# Altium PCB PCBSystemPolive.PcbDoc
Units mm, origin at the board's own origin, x right, y up, seen from the top; angles counter-clockwise.
Board outline 112.5 x 65 mm, 2 copper layers (Top Layer, Bottom Layer), stack 1.671 mm thick; 78 components, 47 nets, 251 pads, 53 vias.
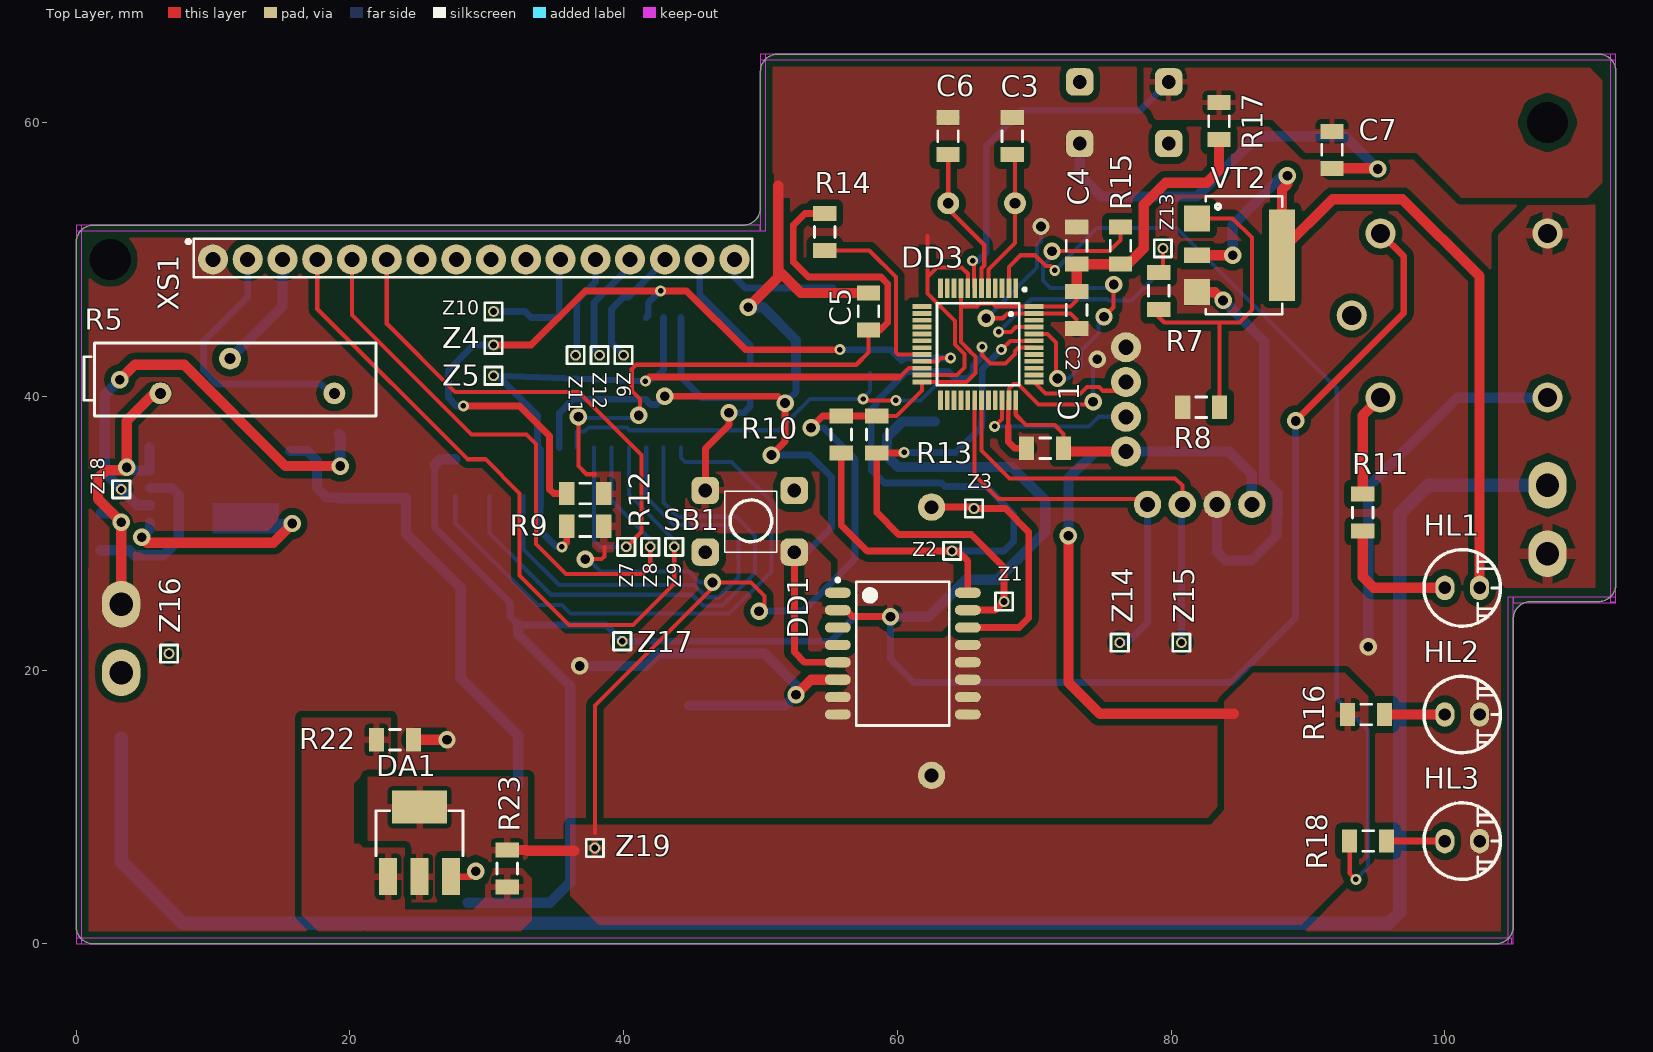
[diagram p0: Top Layer view]
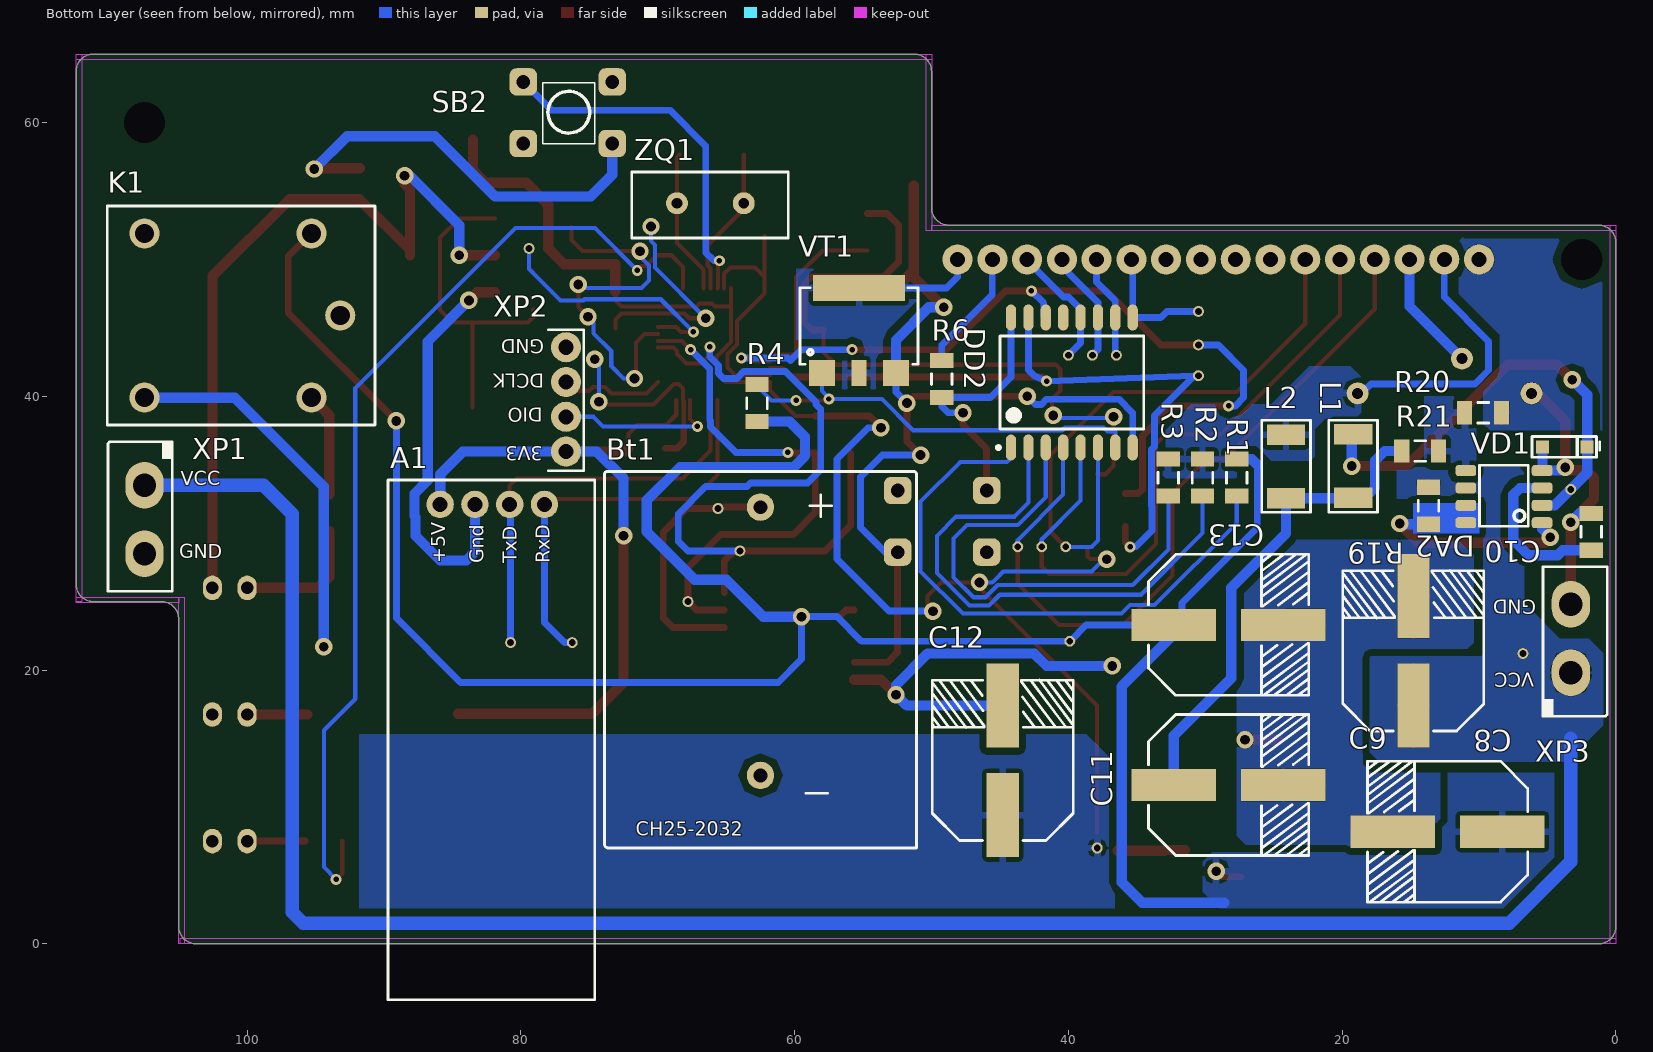
[diagram p1: Bottom Layer view, seen from below]

## Layer stack, top to bottom
Top Solder: solder mask 0.0102, Solder Resist, Dk 3.5
Top Layer: signal copper 0.0356
Dielectric 1: dielectric 1.6, FR-4, Dk 4.8
Bottom Layer: signal copper 0.0356
Bottom Solder: solder mask 0.0102, Solder Resist, Dk 3.5

## Board outline
0,2.5 0,51.23 cw(c1.27,51.23) 1.27,52.5 48.73,52.5 ccw(c48.73,53.77) 50,53.77 50,63.73 cw(c51.27,63.73) 51.27,65 111.23,65 cw(c111.23,63.73) 112.5,63.73 112.5,26.27 cw(c111.23,26.27) 111.23,25 106.27,25 ccw(c106.27,23.73) 105,23.73 105,1.27 cw(c103.73,1.27) 103.73,0 1.27,0 cw(c1.27,1.27) 0,1.27

## Design rules (kind name [scope] priority, off if disabled: settings)
Clearance [All] p1: gap=0.5 ignorepadtopadclearanceinfootprint=FALSE except(0.125: Track-Track Track-SMDPad SMDPad-SMDPad; 0.3: Arc-Arc Arc-Track Arc-SMDPad Arc-Via Track-Via Track-Fill SMDPad-THPad SMDPad-Via SMDPad-Fill THPad-THPad Via-Via Via-Fill; 0.7: Arc-Hole)
PlaneClearance [All] p1: clearance=0.75
PlaneConnect DigPAD [InPadClass('DigitAndOther')] p1: planeconnectstyle=Relief reliefexpansion=0.5 reliefentries=4 reliefconductorwidth=0.5 reliefairgap=0.3
PlaneConnect PowerPad [InPadClass('Power')] p2: planeconnectstyle=Direct reliefexpansion=0.508 reliefentries=4 reliefconductorwidth=0.254 reliefairgap=0.254
PolygonConnect PolygonConnect_5VDC [InNetClass('Power5V_3V3')] p1: connectstyle=Relief reliefconductorwidth=0.5 reliefentries=4 polygonreliefangle="90 Angle" airgapwidth=0.3
PolygonConnect PolygonConnectDIG [InNetClass('DigitalNet')] p2: connectstyle=Relief reliefconductorwidth=0.4 reliefentries=4 polygonreliefangle="90 Angle" airgapwidth=0.3
RoutingVias DIG [InNetClass('DigitalNet')] p1: holewidth=0.4 width=0.8 viastyle="Through Hole" minholewidth=0.4 minwidth=0.8 maxholewidth=0.4 maxwidth=0.8
RoutingVias 5Voltage [InNetClass('DigitalNet')] p2: holewidth=0.4 width=0.8 viastyle="Through Hole" minholewidth=0.4 minwidth=0.8 maxholewidth=0.4 maxwidth=0.8
SolderMaskExpansion [All] p1: expansion=0.102
Width DGITVDC [InNetClass('DigitalNet')] p1: maxlimit=0.5 minlimit=0.3 preferedwidth=0.35
Width 5VDC [InNetClass('Power5V_3V3')] p2: maxlimit=0.75 minlimit=0.3 preferedwidth=0.5
Width 24VDC [InNetClass('Power24V')] p3: maxlimit=1.5 minlimit=0.3 preferedwidth=0.75
28 further rules are at their usual default settings.

## Classes and differential pairs
component class LCD2004: DD2 R1 R2 R3 R4 R5 R6 VT1 XS1 Z4 Z5 Z6 Z7 Z8 Z9 Z10 Z11 Z12
component class RTC: Bt1 DD1 SB1 Z1 Z2 Z3
component class "Блок Питания": C8 C9 C10 C11 C12 C13 DA1 DA2 L1 L2 R19 R20 R21 R22 R23 VD1 XP3 Z16 Z17 Z18 Z19
component class Микроконтроллер: A1 C1 C2 C3 C4 C5 C6 C7 DD3 HL1 HL2 HL3 K1 R7 R8 R9 R10 R11 R12 R13 R14 R15 R16 R17 R18 SB2 VT2 XP1 XP2 Z13 Z14 Z15 ZQ1
net class DigitalNet: D4 D5 D6 D7 DCLK DIO E LED_OUT NetC3_1 NetC6_1 NetDD1_15 NetDD1_16 NetDD2_14 NetDD2_15 NetHL3_1 P3 pump_out RESET RS RW RxD TxD
net class Power5V_3V3: +3V3 +5V NetBt1_1 NetC11_1 NetDA1_1 NetDA2_2 NetDA2_5 NetDD2_1 NetDD2_2 NetDD2_3 NetHL1_1 NetHL1_2 NetHL2_1 NetK1_5 NetR5_2 NetR6_2 NetVT1_2
net class Power24V: +24V GND NetDA2_1 NetK1_3
pad class Power: C8-1 C8-2 C9-1 C9-2 C10-1 C10-2 C11-1 C11-2 C12-1 C12-2 C13-1 C13-2 DA1-1 DA1-2 DA1-3 DA2-1 DA2-2 DA2-3 DA2-4 DA2-5 DA2-6 DA2-7 K1-1 K1-2 K1-3 K1-4 K1-5 L1-1 L1-2 L2-1 L2-2 R1-1 R1-2 R2-1 R2-2 R3-1 R3-2 R4-1 R4-2 R5-1 R5-2 R5-3 R6-1 R6-2 R19-1 R19-2 R20-1 R20-2 R21-1 R21-2 R22-1 R22-2 R23-1 R23-2 VD1-1 VD1-2 VT1-2 VT2-2 XP1-1 XP1-2 XP2-3 XP3-1 XP3-2 Z1-1 Z2-1 Z3-1 Z4-1 Z5-1 Z6-1 Z7-1 Z8-1 Z9-1 Z10-1 Z11-1 Z12-1 Z13-1 Z14-1 Z15-1 Z16-1 Z17-1 Z18-1 Z19-1
pad class DigitAndOther: A1-1 A1-2 A1-3 A1-4 Bt1-1 Bt1-2 C1-1 C1-2 C2-1 C2-2 C3-1 C3-2 C4-1 C4-2 C5-1 C5-2 C6-1 C6-2 C7-1 C7-2 DA2-8 DD1-1 DD1-2 DD1-3 DD1-4 DD1-5 DD1-6 DD1-7 DD1-8 DD1-9 DD1-10 DD1-11 DD1-12 DD1-13 DD1-14 DD1-15 DD1-16 DD2-1 DD2-2 DD2-3 DD2-4 DD2-5 DD2-6 DD2-7 DD2-8 DD2-9 DD2-10 DD2-11 DD2-12 DD2-13 DD2-14 DD2-15 DD2-16 DD3-1 DD3-2 DD3-3 DD3-4 DD3-5 DD3-6 DD3-7 DD3-8 DD3-9 DD3-10 DD3-11 DD3-12 DD3-13 DD3-14 DD3-15 DD3-16 DD3-17 DD3-18 DD3-19 DD3-20 DD3-21 DD3-22 DD3-23 DD3-24 DD3-25 DD3-26 DD3-27 DD3-28 DD3-29 DD3-30 DD3-31 DD3-32 DD3-33 DD3-34 DD3-35 DD3-36 DD3-37 DD3-38 DD3-39 DD3-40 DD3-41 DD3-42 DD3-43 DD3-44 DD3-45 DD3-46 DD3-47 DD3-48 Free-0 HL1-1 HL1-2 HL2-1 HL2-2 HL3-1 HL3-2 R7-1 R7-2 R8-1 R8-2 R9-1 R9-2 R10-1 R10-2 R12-1 R12-2 R13-1 R13-2 R14-1 R14-2 R15-1 R15-2 R16-1 R16-2 R17-1 R17-2 R18-1 R18-2 VT1-1 VT1-2 VT1-3 VT2-1 VT2-2 VT2-3 XP2-1 XP2-2 XP2-3 XP2-4 XS1-1 XS1-2 XS1-3 XS1-4 XS1-5 XS1-6 XS1-7 XS1-8 XS1-9 XS1-10 XS1-11 XS1-12 XS1-13 XS1-14 XS1-15 XS1-16 ZQ1-1 ZQ1-2

## Components (designator, comment, footprint, x,y, rotation, side; value= is the part's Value field where it differs from the comment)
A1 "HC-06" HC-06 85.9,32.1 r180 bottom
Bt1 "CH-2032" CH25-2032 62.6,18.3 r180 bottom value=2032
C1 "100n" CAP1206 70.8,36.2 r180 top value=100nF
C2 "100n" CAP1206 73.1,46.3 r270 top value=100nF
C3 "12pF" CAP1206 68.4,59 r90 top
C4 "100n" CAP1206 73.1,51 r90 top value=100nF
C5 "100n" CAP1206 57.9,46.2 r90 top value=100nF
C6 "12pF" CAP1206 63.7,59 r90 top
C7 "100n" CAP1206 91.75,58 r270 top
C8 "100u" CAPAE120103X105MTypeG 14.8,21.4 r90 bottom value=100uF
C9 "100u" CAPAE120103X105MTypeG 12.3,8.188 r0 bottom value=100uF
C10 "470p" CAP1206 1.8,30.1 r90 bottom
C11 "100u" CAPAE120103X105MTypeG 28.3,11.6 r180 bottom value=100uF
C12 "100u" CAPAE120103X105MTypeG 44.8,13.4 r90 bottom value=100uF
C13 "100u" CAPAE120103X105MTypeG 28.3,23.3 r180 bottom value=100uF
DA1 "lm317" SOD-223 22.8,4.9 r0 top value=1.5A
DA2 "MC34063" SO-8 6.162,30.76 r0 bottom
DD1 "DS3231" SO-16 60.4,21.2 r0 top value=RTC
DD2 "PCF8574" SO-16 39.75,41 r90 bottom value=IC
DD3 "stm32f103c8t6" LQFP48 65.9,43.8 r270 top value=MPU
HL1 "GNL-3014" GNL-3014 100,26 r0 top value=RED
HL2 "GNL-3014" GNL-3014 100,16.75 r0 top value=RED
HL3 "GNL-3014" GNL-3014 100,7.5 r0 top value=RED
K1 "HJR-3FF-5VDC-S-Z" HJR-3FF 93.2,45.9 r0 bottom value=5V
L1 "CM453232-221KL" 453232 19.2,37.239 r270 bottom value=220u
L2 "CM453232-221KL" 453232 24.1,32.54 r90 bottom value=220u
R1 "10k" 1206 27.7,34.05 r270 bottom
R2 "10k" 1206 30.2,34.05 r270 bottom
R3 "10k" 1206 32.7,34.05 r270 bottom
R4 "4k7" 1206 62.75,39.5 r270 bottom value=4.7k
R5 "10kОм" 3006P 18.87,40.21 r180 top
R6 "100" 1206 49.25,41.25 r90 bottom
R7 "680" 1206 79.1,47.7 r90 top
R8 "10k" 1206 82.2,39.2 r0 top
R9 "4k7" 1206 37.2,30.5 r0 top value=4.7k
R10 "4k7" 1206 55.9,37.2 r90 top value=4.7k
R11 "680" 1206 94,31.5 r90 top
R12 "4k7" 1206 37.2,32.9 r0 top value=4.7k
R13 "4k7" 1206 58.5,37.2 r90 top value=4.7k
R14 "Resistor" 1206 54.7,52 r270 top value=100k
R15 "Resistor" 1206 76.3,51 r270 top value=100k
R16 "680" 1206 94.25,16.75 r0 top
R17 "10k" 1206 83.5,60.1 r270 top
R18 "680" 1206 94.4,7.5 r0 top
R19 "0.33" 1206 13.7,32 r270 bottom
R20 "1k2" 1206 9.7,38.8 r180 bottom
R21 "3k6" 1206 14.3,36 r0 bottom
R22 "12k" 1206 23.3,14.9 r0 top
R23 "10k" 1206 31.5,5.5 r90 top value=10K
SB1 "KLS7 TS6601-4.3" KLS2 49.3,30.9 r180 top value=100VDC
SB2 "KLS7 TS6601-4.3" KLS2 76.5,60.75 r0 bottom value=100VDC
VD1 "1N5819" SOD-123 5.366,36.3 r180 bottom value=40V
VT1 "BCP56" SOT223 55.3,41.7 r180 bottom
VT2 "BCP56" SOT223 81.9,50.3 r270 top
XP1 "KLS-2" KLS2-EDR-500-2P 107.5,33.5 r270 bottom value=1000VAC
XP2 "pls-4" Connector_STKLink 76.7,35.96 r90 bottom value=24VDC
XP3 "XY2500R-A-2P" KLS2-EDR-500-2P 3.3,19.8 r90 bottom value=500VDC
XS1 "DS1023x16" DS1023-2.54x16x1 10,50 r0 top value=500VDC
Z1 "test Point" "test Point" 67.8,25 r0 top
Z2 "test Point" "test Point" 64,28.7 r0 top
Z3 "test Point" "test Point" 65.6,31.8 r0 top
Z4 "test Point" "test Point" 30.5,43.75 r0 top
Z5 "test Point" "test Point" 30.5,41.5 r0 top
Z6 "test Point" "test Point" 40,43 r270 top
Z7 "test Point" "test Point" 40.2,29 r0 top
Z8 "test Point" "test Point" 41.95,29 r0 top
Z9 "test Point" "test Point" 43.7,29 r0 top
Z10 "test Point" "test Point" 30.5,46.2 r90 top
Z11 "test Point" "test Point" 36.5,43 r270 top
Z12 "test Point" "test Point" 38.25,43 r0 top
Z13 "test Point" "test Point" 79.4,50.8 r90 top
Z14 "test Point" "test Point" 76.25,22 r90 top
Z15 "test Point" "test Point" 80.75,22 r90 top
Z16 "test Point" "test Point" 6.8,21.2 r90 top
Z17 "test Point" "test Point" 39.9,22.1 r90 top
Z18 "test Point" "test Point" 3.3,33.2 r90 top
Z19 "test Point" "test Point" 37.9,7 r90 top
ZQ1 "8MHz" HC-49US 68.6,54.1 r180 bottom

## Footprints (in the part's own frame and the unit in brackets; to place one, negate y for a bottom-side part, rotate by r counter-clockwise, add the part's x,y. Pads: shape width x height; smd on the part's side, far side on the other; paste and mask are expansions set on the pad)
1206 [mm]
  rect 1.1x1.7 smd: 1(-1.35,0) 2(1.35,0)
  silkscreen extent -0.4,-0.75 0.4,0.75, body extent -1.55,-0.83 1.55,0.83, height 0.67
3006P [mm]
  round 1.6 hole 0.8: 1(0,0) 2(7.62,-2.54) 3(12.7,0)
  silkscreen extent -3.05,-3.68 18.29,1.65, body extent -3.05,-3.43 17.52,1.4, height 6.85
453232 [mm]
  rect 1.5x2.8 smd: 1(0,0) 2(4.639,0)
  silkscreen extent -1.02,-1.78 5.72,1.78, body extent -0.04,-1.65 4.61,1.55, height 3.05
CAP1206 [mm]
  rect 1.1x1.7 smd: 1(-1.35,0) 2(1.35,0)
  silkscreen extent -0.4,-0.75 0.4,0.75, body extent -1.6,-0.8 1.6,0.8, height 1.25
CAPAE120103X105MTypeG [mm] "Aluminum Electrolytic Capacitor, Body 11,70x10,30x10,50mm, IPC Low Density"
  rect 6.15x2.35 smd: 1(-4,0) 2(4,0)
  silkscreen extent -5.85,-5.15 5.86,5.15, body extent -5.65,-5.15 5.65,5.15, height 10.8
CH25-2032 [mm]
  round 2 hole 1: 1(0.1,13.6) 2(0.1,-6)
  silkscreen extent -11.3,-11.3 11.5,16.2, body extent -11.3,-11.3 11.5,16.2, height 9.4
Connector_STKLink [mm]
  round 2.2 hole 1.1: 1(0,0) 2(2.54,0) 3(5.08,0) 4(7.62,0)
  silkscreen extent -1.4,-1.3 8.9,1.3, body extent -1.24,-1.3 8.92,1.24, height 8.54
DS1023-2.54x16x1 [mm]
  round 2.2 hole 1.1: 1(0,0) 2(2.54,0) 3(5.08,0) 4(7.62,0) 5(10.16,0) 6(12.7,0) 7(15.24,0) 8(17.78,0) 9(20.32,0) 10(22.86,0) 11(25.4,0) 12(27.94,0) 13(30.48,0) 14(33.02,0) 15(35.56,0) 16(38.1,0)
  silkscreen extent -1.94,-1.3 39.4,1.5, body extent -1.27,-1.27 39.37,1.27, height 8.5
GNL-3014 [mm]
  oval 1.4x1.8 hole 0.9: 1(0,0) 2(2.54,0)
  silkscreen extent -1.52,-2.79 4.06,2.79, body extent -0.72,-1.5 3.26,1.99, height 6.38
HC-06 [mm]
  round 2 hole 1.1: 1(0,0) 2(2.54,0) 3(5.08,0) 4(7.62,0)
  silkscreen extent -3.81,-36.19 11.3,1.78, body extent -3.82,-36.22 11.18,1.78, height 8.46
HC-49US [mm]
  round 1.6 hole 0.8: 1(0,0) 2(4.88,0)
  silkscreen extent -3.3,-2.54 8.13,2.29, body extent -3.26,-2.41 8.09,2.24, height 3.6
HJR-3FF [mm]
  round 2.2 hole 1.4: 1(0,0) 2(2.1,-6) 3(14.3,-6) 4(14.3,6) 5(2.1,6)
  silkscreen extent -2.54,-8 17.02,8, body extent -2.26,-7.7 16.74,7.7, height 16.5
KLS2 [mm]
  rrect50% 2x2 hole 1: 1(-3.175,2.286) 2(3.325,2.286) 3(-3.175,-2.214) 4(3.325,-2.214)
  silkscreen extent -1.91,-2.16 1.9,2.29, body extent -3.12,-3 3.38,3, height 7.5
KLS2-EDR-500-2P [mm]
  oval 3.4x2.8 hole 1.7: 1(0,0) 2(5,0)
  silkscreen extent -3.18,-2.67 7.75,2.03, body extent -3,-20.69 7.49,1.64, height 18.12
LQFP48 [mm]
  rect 1.4x0.35 smd mask+0.05: 1(-4.088,2.75) 2(-4.088,2.25) 3(-4.088,1.75) 4(-4.088,1.25) 5(-4.088,0.75) 6(-4.088,0.25) 7(-4.088,-0.25) 8(-4.088,-0.75) 9(-4.088,-1.25) 10(-4.088,-1.75) 11(-4.088,-2.25) 12(-4.088,-2.75) 25(4.088,-2.75) 26(4.088,-2.25) 27(4.088,-1.75) 28(4.088,-1.25) 29(4.088,-0.75) 30(4.088,-0.25) 31(4.088,0.25) 32(4.088,0.75) 33(4.088,1.25) 34(4.088,1.75) 35(4.088,2.25) 36(4.088,2.75)
  rect 0.35x1.4 smd mask+0.05: 13(-2.75,-4.088) 14(-2.25,-4.088) 15(-1.75,-4.088) 16(-1.25,-4.088) 17(-0.75,-4.088) 18(-0.25,-4.088) 19(0.25,-4.088) 20(0.75,-4.088) 21(1.25,-4.088) 22(1.75,-4.088) 23(2.25,-4.088) 24(2.75,-4.088) 37(2.75,4.088) 38(2.25,4.088) 39(1.75,4.088) 40(1.25,4.088) 41(0.75,4.088) 42(0.25,4.088) 43(-0.25,4.088) 44(-0.75,4.088) 45(-1.25,4.088) 46(-1.75,4.088) 47(-2.25,4.088) 48(-2.75,4.088)
  silkscreen extent -4.1,-3 3,3.5, body extent -4.57,-4.57 4.57,4.57, height 1.62
SO-8 [mm]
  rrect50% 1.505x0.802 smd: 1(-0.762,0) 2(-0.762,-1.27) 3(-0.762,-2.54) 4(-0.762,-3.81) 5(4.8,-3.81) 6(4.8,-2.54) 7(4.8,-1.27) 8(4.8,0)
  silkscreen extent 0.25,-4.19 3.81,0.25, body extent -0.86,-4.39 4.92,0.51, height 1.45
SO-16 [mm] "SOIC, 16-Leads, Body 10,29x7,50mm, Pitch 1,27mm, IPC Medium Density"
  oval 1.9x0.75 smd: 1(-4.75,4.445) 2(-4.75,3.175) 3(-4.75,1.905) 4(-4.75,0.635) 5(-4.75,-0.635) 6(-4.75,-1.905) 7(-4.75,-3.175) 8(-4.75,-4.445) 9(4.75,-4.445) 10(4.75,-3.175) 11(4.75,-1.905) 12(4.75,-0.635) 13(4.75,0.635) 14(4.75,1.905) 15(4.75,3.175) 16(4.75,4.445)
  silkscreen extent -4.87,-5.25 3.4,5.49, body extent -5.15,-5.1 5.15,5.1, height 3.5
SOD-123 [mm]
  rect 0.95x0.95 smd: 1(0,0) 2(3.266,0)
  silkscreen extent -0.76,-0.76 4.19,0.76, body extent -0.2,-0.8 3.5,0.8, height 1.27
SOD-223 [mm]
  rect 1.3x2.7 smd: 1(0,0) 2(2.3,0) 3(4.6,0)
  rect 4x2.4 smd: 2(2.3,5.08)
  silkscreen extent -0.89,1.52 5.46,4.83, body extent -0.96,-1.19 5.54,5.77, height 1.7
SOT223 [mm]
  rect 1.9x1.9 smd: 1(-2.7,0) 3(2.7,0)
  rect 1.1x1.9 smd: 2(0,0)
  rect 6.7x1.9 smd: 2(0,6.2)
  silkscreen extent -4.32,0.63 4.32,6.22, body extent -3.25,0.06 3.25,7.06, height 1.7
"test Point" [mm]
  round 0.8 hole 0.5: 1(0,0)
  silkscreen extent -0.64,-0.64 0.64,0.64

## Part data
A1: Manufacturer=china, Package=none, Part Number=HC-06, Price=5, Quantity=1
Bt1: library part CR-2032, Manufacturer=Comf, Package=CH25-2032, Part Number=CH25-2032, Price=0.36, Quantity=2, ShoppingPlace=http://belchip.by/product/?selected_product=12241
C1 C2 C4 C5: library part Capasitor, Manufacturer=Samsung, Package=1206, Part Number=CL31B104KBCNNNC, Voltage=50V, Price=0.035, Quantity=20, ShoppingPlace=http://belchip.by/product/?selected_product=31093
C3 C6: library part Capasitor, Manufacturer=Samsung, Package=1206, Part Number=1206120NPO, Voltage=50V, Price=0,025, Quantity=20, ShoppingPlace=http://belchip.by/product/?selected_product=00255
C7: library part Capasitor
C8 C9 C11 C12 C13: library part "Capasitor Electrolit", Manufacturer=Samwha, Package=TypeG, Part Namber=RC1H107M08010VR, Power=50V, Price=0.23, ShoppingPlace=http://belchip.by/product/?selected_product=12709
C10: library part Capasitor, Manufacturer="FAITHFULL LINK", Package=1206, Part Number=1206471X7R, Voltage=50V, Price=0.02, Quantity=4, ShoppingPlace=http://belchip.by/product/?selected_product=00281
DA1: Manufacturer="Texas Instruments", Package=SOT-223, Part Number=LM317AEMP/NOPB, Price=2.5, Quantity=1, ShoppingPlace=http://belchip.by/product/?selected_product=11445
DA2: Manufacturer="ON Semiconductor", Package=SO-8, Part Number=MC34063ADR, Price=0,3, Quantity=4, ShoppingPlace=http://belchip.by/product/?selected_product=28823
DD1: Manufacture="Maxim Integrated Products", Part Number=DS3231SN, Packge=SO-16, Price=4, Quantity=1, ShoppingPlace=http://belchip.by/product/?selected_product=06391
DD2: Manufacturer="Texas Instruments", Package=SO-16, Part Number=PCF8574DW, Price=1.585, Quantity=3, ShoppingPlace=http://belchip.by/product/?selected_product=29967
DD3: Manufacturer=STM, Package=LQFP48, Part Number=stm32f103c8t6, Price=4, Quantity=1, ShoppingPlace=http://belchip.by/product/?selected_product=10603
HL1 HL2 HL3: library part LED, Manufacturer=G-NOR, Package=GNL, Part Number=GNL-3014SRD, Price=0.04, Quantity=6, Shopping Place=http://belchip.by/product/?selected_product=00813
K1: Manufacturer=TIANBO, Package=HJR-3FF, Part Number=HJR-3FF-5VDC-S-Z, Price=0.6, Quantity=1, ShoppingPlace=http://belchip.by/product/?selected_product=00571
L1 L2: Manufacturer=Bourns, Package=1812, Part Number=CM453232-221KL, Price=0.225, Quantity=2, ShoppingPlace=https://www.ru-chipdip.by/product/cm453232-221kl
R1 R2 R3 R8 R17 R22 R23: library part Resistor, Manufacturer=YAGEO, Package=1206, Part Number=RC1206FR-0710KL, Power=0.25W, Price=0.15
  R1 R2 R3 R8 R17: Quntity=4, ShoppingPlace=http://belchip.by/product/?selected_product=30985
  R22: Quntity=3, ShoppingPlace=http://belchip.by/product/?selected_product=01409
  R23: Quntity=3, ShoppingPlace=http://belchip.by/product/?selected_product=30985
R4 R9 R10 R12 R13: library part Resistor, Manufacturer=YAGEO, Package=1206, Part Number=RC1206JR-074K7L, Power=0.25W, Price=0,15, Quntity=4, ShoppingPlace=http://belchip.by/product/?selected_product=01399
R5: library part POT, Manufacturer=Bours, Package=3006, Part Number=3006-103-Z-LF, Power=0,125W, Price=0,445, Quantity=1, ShoppingPlace=http://belchip.by/product/?selected_product=32831
R6: library part Resistor, Manufacturer=YAGEO, Package=1206, Part Number=RC1206FR-07100RL, Power=0.25W, Price=0.15, Quntity=4, ShoppingPlace=http://belchip.by/product/?selected_product=18520
R7 R11 R16 R18: library part Resistor, Manufacturer=YAGEO, Package=1206, Part Number=RC1206JR-07680RL, Power=0.25W, Price=0,15, Quntity=4, ShoppingPlace=http://belchip.by/product/?selected_product=01380
R14 R15: Manufacturer=YAGEO, Package=1206, Part Number=RC1206JR-07100KL, Power=0.25W, Price=0,15, Quntity=4, ShoppingPlace=http://belchip.by/product/?selected_product=31131
R19: library part Resistor, Manufacturer="Royal Ohm", Package=1206, Part Number=1206R033, Power=0.25, Price=0.5, Quntity=3, ShoppingPlace=http://belchip.by/product/?selected_product=32979
R20: library part Resistor, Manufacturer="Royal Ohm", Package=1206, Part Number=1206R122, Power=0.25, Price=0.5, Quntity=3, ShoppingPlace=http://belchip.by/product/?selected_product=01386
R21: library part Resistor, Manufacturer="Royal Ohm", Package=1206, Part Number=1206R362, Power=0.25, Price=0.5, Quntity=3, ShoppingPlace=http://belchip.by/product/?selected_product=01396
SB1 SB2: library part Button, Manufacturer=KLS, Package=KLS2, Part Number="KLS7 TS6601-4.3", Price=0,04, Quantity=6, ShoppingPlace=http://belchip.by/product/?selected_product=02682
VD1: Manufacturer=GALAXY, Package=SOD-123, Power=1A, Price=0.12, Quantity=3, ShoppingPlace=http://belchip.by/product/?selected_product=08853
VT1 VT2: library part BCP56-16, Manufacturer="NXP Semiconductors", Package=SOT223, Part Number=BCP56-16, Price=BCP56, Quantity=2, ShoppingPlace=http://belchip.by/product/?selected_product=12583
XP1: library part Connector_Power, Package=KLS2, Part Number=KLS2-EDR, Price=0,13, Quantity=2, ShoppingPlace=http://belchip.by/product/?selected_product=03190
XP2: library part Connector_STKLink, Manufacturer=RUICHI, Part Number=pls-40, Price=0,12, Quantity=2, ShoppingPlace=http://belchip.by/product/?selected_product=02009
XP3: library part Connector_Power, Package=XY2500R, Part Number=XY2500R-A-2P, Price=0,10, Quantity=1, ShoppingPlace=http://belchip.by/product/?selected_product=14514
XS1: library part DS1023x2.54x16x1, Manufacturer="Ningbo connfly electronic", Package=DS1023, Part Number=DS1023-1*16S21, Price=0.12, Quantity=4, ShoppingPlace=https://www.ru-chipdip.by/product/pbs16
ZQ1: library part Rzanator, Manufacturer=GEYER, Package=HC-49US, Part Number=HC-49US, Price=0,255, Quantity=1, ShoppingPlace=http://belchip.by/product/?selected_product=33253

## Free pads (board coordinates)
  round 0 hole 3: 0(2.5,50) 0(107.5,60)

## Via types
v1: diameter 1.27, hole 0.711, Top Layer to Bottom Layer, 37 vias
v2: diameter 0.8, hole 0.4, Top Layer to Bottom Layer, 16 vias

## Nets (pads, with @x,y where several pads share a name; then routed paths per layer and width w, separated by ;. In a path a pad name is that pad's centre, name@x,y a point inside that pad or via, vN(x,y) a via of type N, cw(c..) or ccw(c..) an arc to the next point about the centre after c; other vN are vias at no path point)
+3V3: A1.1 C1.1 C2.1 C4.1 C5.1 C12.1 DA1.2 DD3.9 DD3.24 DD3.36 DD3.48 R9.2 R10.2 R12.2 R13.2 R14.1 R15.2 R16.1 R17.2 R23.2 XP2.1 Z19.1 | length 220.1
  Top Layer w0.3: v1(36.7,38.5) 36.7,34.9 37.3,34.3 37.9,34.3 ; v1(37.2,28.1) 38.4,28.1 38.6,28.3 38.6,29 ; 37.9,8.1 37.9,17.4 v1@46.7,26.2 ; v1(41.1,38.6) 41.2,38.5 41.2,39.8 40.6,40.4 40.6,42 40.9,42.3 57,42.3 57.9,43.2 C5.1 ; v1(46.5,26.4) 49.3,26.4 50.3,25.4 50.3,24.7 v1(49.9,24.3) ; R13.2 59.952,38.55 61.812,40.41 DD3.24 65.05,41.05 65.7,41.7 65.7,42.898 65.35,43.248 65.35,43.25 64.65,43.95 64.65,46.7 ; DD3.9 64.65,46.7 ; DD3.36 68.65,38.65 69.4,37.9 71.5,37.9 72.15,37.25 C1.1 ; C2.1 73.1,47 72.65,46.55 DD3.48 67.184,46.55 66.949,46.785 66.051,46.785 65.816,46.55 64.8,46.55 64.65,46.7
  Top Layer w0.5: v1(53.7,37.7) 54.55,38.55 R10.2 R13.2 ; R14.1 53.25,53.35 52.4,52.5 52.4,49.8 53.5,48.7 58.8,48.7 59.3,48.2 59.3,45.4 58.75,44.85 C5.1
  Top Layer w0.75: R23.2 32.95,6.85 33,6.8 36.4,6.8 ; C1.1 72.39,35.96 XP2.1 ; v1(72.5,29.8) 72.5,19.1 74.8,16.8 84.6,16.8 ; C2.1 C4.1 R15.2 76.85,49.65 78,50.8 78,54 79.6,55.6 82.6,55.6 83.5,56.5 R17.2
  Bottom Layer w0.3: v1(36.7,38.5) 36.8,38.4 40.9,38.4 v1(41.1,38.6) ; v1(37.2,28.1) 37.4,28.1 38.3,27.2 44.763,27.2 45.338,26.625 45.341,26.625 45.567,26.4 v1(46.5,26.4)
  Bottom Layer w0.5: v1(49.9,24.3) 53.1,24.3 56.9,28.1 56.9,35.4 54.6,37.7 v1(53.7,37.7)
  Bottom Layer w0.75: v1(72.5,29.8) 72.5,34 74.46,35.96 XP2.1 84.24,35.96 85.9,34.3 A1.1
+5V: C9.1 C13.1 DA1.3 DD1.2 DD1.4 DD2.16 K1.2 L2.2 R1.1 R2.1 R3.1 R4.2 R5.1 R6.1 SB1.4 XS1.2 Z17.1 | length 219.2
  Top Layer w0.5: DA1.3 28.8,4.9 v1(29.2,5.3) ; SB1.4 45.975,36.175 47.7,37.9 v1(47.7,38.8) ; DD1.2 56.263,24.375 56.738,23.9 v1(59.5,23.9) ; v1(89.1,38.2) 97,46.1 97,50.2 K1.2
  Bottom Layer w0.5: XS1.2 12.54,47.24 9.3,44 9.3,41.9 10.3,40.9 17.9,40.9 18.59,40.21 R5.1 ; 26.2,35 26.2,30.4 31.7,24.9 31.7,23.9 C13.1 38.7,23.3 Z17.1 55.1,22.1 56.9,23.9 v1(59.5,23.9) 59.5,20.8 61.2,19.1 84.4,19.1 89.1,23.8 v1(89.1,38.2) ; DD2.16 44.195,41.405 45.7,39.9 R6.1 49.25,39.25 48.8,38.8 v1(47.7,38.8)
  Bottom Layer w0.75: 26.2,35 26.6,35.4 R1.1 ; 28.6,3 34.6,3 36.1,4.5 36.1,18.8 32.3,22.6 C13.1 ; v1(59.5,23.9) 62.3,23.9 65,26.6 67.3,26.6 70.8,30.1 70.8,32.4 68.375,34.825 60.055,34.825 59.25,35.63 59.25,37.05 60.35,38.15 R4.2
+24V: C8.1 DA2.6 R19.1 XP1.1 XP3.1 Z16.1 | length 145.4
  Bottom Layer w1: 3.3,15 3.3,6 7.8,1.5 95.9,1.5 96.7,2.3 96.7,31.4 98.8,33.5 XP1.1
D4: DD2.9 XS1.11 Z10.1 | length 9.3
  Bottom Layer w0.5: Z10.1 32.8,46.2 33.25,45.75 DD2.9 35.305,49.905 XS1.11
D5: DD2.10 XS1.12 Z11.1 | length 7.6
  Bottom Layer w0.5: Z11.1 36.575,43.075 DD2.10 36.575,46.975 37.94,48.34 XS1.12
D6: DD2.11 XS1.13 Z12.1 | length 8.3
  Bottom Layer w0.5: Z12.1 37.845,43.405 DD2.11 37.845,46.845 40.48,49.48 XS1.13
D7: DD2.12 XS1.14 Z6.1 | length 9.4
  Bottom Layer w0.5: Z6.1 39.115,43.885 DD2.12 39.115,46.363 40.002,47.25 40.346,47.25 42.33,49.234 42.33,49.73 42.6,50 XS1.14
DCLK: DD3.37 XP2.3 | length 7.6
  Top Layer w0.3: DD3.37 70.823,40.215 73.381,40.215 73.851,40.685 74.749,40.685 75.034,40.4 76.06,40.4 XP2.3
DIO: DD3.34 XP2.2 | length 12
  Top Layer w0.3: v2(67.1,37.8) 67.65,38.35 DD3.34
  Bottom Layer w0.3: v2(67.1,37.8) 74,37.8 74.7,38.5 XP2.2
E: DD2.6 XS1.6 Z7.1 | length 43.8
  Top Layer w0.3: XS1.6 22.7,45.3 27.7,40.3 36.7,40.3 41.3,35.7 41.3,30.1 Z7.1
  Bottom Layer w0.3: DD2.6 37.845,29.455 38.3,29 Z7.1
GND: A1.2 Bt1.2 C1.2 C2.2 C3.2 C4.2 C5.2 C6.2 C7.2 C8.2 C9.2 C10.2 C11.2 C12.2 C13.2 DA2.4 DD1.5 DD1.6 DD1.7 DD1.8 DD1.9 DD1.10 DD1.11 DD1.12 DD1.13 DD2.8 DD3.8 DD3.23 DD3.35 DD3.47 HL2.2 HL3.2 K1.4 R5.3 R8.1 R20.2 R22.2 SB1.1 SB2.1 VD1.1 VT1.3 VT2.3 XP2.4 XP3.2 XS1.1 | length 268.5
  Top Layer w0.3: DD3.23 64.35,41.55 64.9,42.1 64.9,43.099 64.225,43.774 64.225,44.075 64.2,44.1 64.2,45.5 62.2,47.5 62.2,48.7 ; 62.2,51.7 62.2,48.7 ; DD3.8 65.15,48.95 64.7,49.4 62.9,49.4 62.2,48.7 ; v1(66.5,45.7) 67.7,45.7 68.05,46.05 DD3.47 72.65,46.05 73.1,45.6 C2.2 ; 68.1,37.8 68.1,39.662 DD3.35 68.15,40.55 68.5,40.9 68.8,40.9 70.3,39.4 74.1,39.4 v1(74.3,39.6)
  Top Layer w0.5: v1(43,40) 51.3,40 v1(51.8,39.5) 51.8,36.7 v1(50.8,35.7) ; SB1.1 52.475,21.325 53.235,20.565 DD1.5 ; 68.1,37.8 68.1,36.7 68.6,36.2 C1.2
  Top Layer w0.75: XP3.2 v1(3.3,30.8) 1.6,32.5 1.6,34 2.2,34.6 3.5,34.6 v1(3.7,34.8) 3.7,38.2 5.71,40.21 R5.3 ; R22.2 v1(27.1,14.9) ; v1(49.1,46.5) 51.3,48.7 51.3,49.2 ; 51.3,55.4 51.3,49.2 ; v1(52.6,18.2) 53.695,19.295 DD1.6 ; C5.2 52.95,47.55 51.3,49.2 ; VT2.3 83.2,47.6 v1(83.8,47) ; C7.2 95.15,56.65 v1(95.1,56.6)
  Bottom Layer w0.3: v1(66.5,45.7) 70.215,49.415 70.215,51.049 70.5,51.334 v1(70.5,52.4) ; v1(74.3,39.6) 74.3,42.4 v1(74.6,42.7)
  Bottom Layer w0.5: DD2.8 35.305,38.781 36.309,39.785 41.591,39.785 41.976,39.4 42.4,39.4 v1(43,40) ; v1(50.8,35.7) 53.6,35.7 55.2,34.1 55.2,30.4 53.414,28.614 SB1.1 ; v1(51.8,39.5) 52.6,40.3 VT1.3
  Bottom Layer w0.75: C10.2 2.65,31.45 v1(3.3,30.8) ; v1(3.7,34.8) 3.93,34.57 DA2.4 5.366,34.604 VD1.1 ; v1(36.8,20.3) 41.6,20.3 42.5,21.2 50.3,21.2 52.6,18.9 v1(52.6,18.2) 51.8,17.4 C12.2 ; v1(49.1,46.5) 50.2,46.5 52.6,44.1 VT1.3 ; SB2.1 73.325,56.175 74.9,54.6 81.9,54.6 86.3,59 92.7,59 v1(95.1,56.6) ; A1.2 83.36,28.64 84,28 85.9,28 87.7,29.8 87.7,31.173 87.775,31.248 87.775,32.877 86.8,33.852 86.8,44 v1(83.8,47) ; v1(94.4,21.7) 94.4,33.4 100.9,39.9 K1.4
LED_OUT: DD3.2 R18.1 | length 72.7
  Top Layer w0.3: DD3.2 68.15,49.45 69,50.3 70.066,50.3 70.851,49.515 71.185,49.515 v2(71.5,49.2) ; R18.1 93.05,5.15 v2(93.5,4.7)
  Bottom Layer w0.3: v2(71.5,49.2) 74.6,52.3 80.4,52.3 92.1,40.6 92.1,17.9 94.4,15.6 94.4,5.6 v2(93.5,4.7)
NetBt1_1: Bt1.1 DD1.14 Z3.1 | length 18.9
  Top Layer w0.5: Bt1.1 65.5,31.9 Z3.1 67.9,31.8 69.6,30.1 69.6,23.8 68.905,23.105 DD1.14
NetC3_1: C3.1 DD3.5 ZQ1.1 | length 10.7
  Top Layer w0.3: DD3.5 66.65,49.247 68.6,51.197 ZQ1.1 68.6,57.45 C3.1
NetC6_1: C6.1 DD3.6 ZQ1.2 | length 10.9
  Top Layer w0.3: C6.1 63.72,57.63 ZQ1.2 63.72,53.68 66.35,51.05 66.35,49.548 66.15,49.348 DD3.6
NetC10_1: C10.1 DA2.3 | length 11.9
  Bottom Layer w0.75: C10.1 3.897,28.75 4.257,28.39 6.39,28.39 7.5,29.5 7.5,32.8 7,33.3 DA2.3
NetC11_1: C11.1 L1.2 L2.1 R21.2 | length 35.4
  Bottom Layer w0.75: R21.2 16.9,36 17.6,35.3 17.6,33.3 18.3,32.6 L1.2 19.26,32.54 L2.1 24.1,30 28.1,26 28.1,19.4 32.3,15.2 C11.1
NetDA1_1: DA1.1 R22.1 R23.1
NetDA2_1: DA2.1 DA2.7 DA2.8 R19.2 | length 15.2
  Top Layer w0.75: v1(4.8,29.7) 5.2,29.3 14.4,29.3 v1(15.8,30.7)
  Bottom Layer w0.75: v1(4.8,29.7) 5.4,30.3 DA2.1 ; R19.2 15.75,30.65 v1(15.8,30.7)
NetDA2_2: DA2.2 L1.1 VD1.2 Z18.1 | length 33.5
  Top Layer w0.75: v1(3.2,41.2) 4.3,42.3 7.9,42.3 15.3,34.9 v1(19.3,34.9)
  Bottom Layer w0.75: v1(3.2,41.2) 2.1,40.1 VD1.2 2.1,34.4 Z18.1 4.47,32.03 DA2.2 ; L1.1 19.3,37.139 v1(19.3,34.9)
NetDA2_5: DA2.5 R20.1 R21.1
NetDD1_15: DD1.15 DD3.43 R13.1 Z1.1 | length 38.1
  Top Layer w0.3: v2(67.6,43.4) 68.25,44.05 DD3.43
  Top Layer w0.5: v2(60.5,35.9) 60.45,35.85 R13.1 58.5,31.5 60.1,29.9 65.4,29.9 67.8,27.5 Z1.1 67.175,24.375 DD1.15
  Bottom Layer w0.5: v2(60.5,35.9) 64.3,35.9 66.15,37.75 66.15,38.194 66.2,38.244 66.2,42 v2(67.6,43.4)
NetDD1_16: DD1.16 DD3.42 R10.1 Z2.1 | length 57.4
  Top Layer w0.3: v2(66.2,43.6) 66.2,43 66.8,42.4 67.9,42.4 68.6,43.1 68.6,43.3 68.85,43.55 DD3.42
  Top Layer w0.5: R10.1 55.9,30.6 57.8,28.7 Z2.1 64.4,28.7 65.15,27.95 DD1.16
  Bottom Layer w0.5: Z2.1 67.8,28.7 68.5,29.4 68.5,31.4 66.5,33.4 63.475,33.4 63.225,33.65 59.05,33.65 58.1,34.6 58.1,39.056 58.45,39.406 58.45,39.594 60.656,41.8 63.73,41.8 64.23,41.3 65.2,41.3 65.575,41.675 65.575,42.259 66.2,42.884 v2(66.2,43.6)
NetDD2_1: DD2.1 R1.2 | length 42.9
  Bottom Layer w0.3: R1.2 27.7,30.75 33.7,24.75 35.489,24.75 36.124,24.115 47.715,24.115 50.8,27.2 50.8,32.3 47.9,35.2 44.5,35.2 44.195,35.505 DD2.1
NetDD2_2: DD2.2 R2.2 | length 39.7
  Bottom Layer w0.3: R2.2 30.2,30 34.7,25.5 45.017,25.5 45.802,24.715 47.215,24.715 49.6,27.1 49.6,29.8 48.2,31.2 43.949,31.2 42.925,32.224 DD2.2
NetDD2_3: DD2.3 R3.2 | length 36.1
  Bottom Layer w0.3: R3.2 32.7,28.8 35.3,26.2 45.165,26.2 46.05,25.315 46.949,25.315 48.4,26.766 48.4,29.6 47.4,30.6 43.7,30.6 41.655,32.645 DD2.3
NetDD2_14: DD2.14 DD3.21 R12.1 Z4.1 | length 61.7
  Top Layer w0.3: DD3.21 62.95,42.55 63.2,42.8 v2(63.9,42.8)
  Top Layer w0.5: v2(28.3,39.3) 32.4,39.3 34.6,37.1 34.6,33.2 34.9,32.9 R12.1 ; Z4.1 33.25,43.75 37.2,47.7 v2(42.7,47.7) 44.6,47.7 48.9,43.4 v2(55.8,43.4)
  Bottom Layer w0.5: v2(28.3,39.3) 27.8,39.3 27.2,39.9 27.2,41.9 29.05,43.75 Z4.1 ; DD2.14 41.8,45.895 41.8,46.8 v2(42.7,47.7) ; v2(55.8,43.4) 59.5,43.4 60.3,42.6 60.5,42.8 v2(63.9,42.8)
NetDD2_15: DD2.15 DD3.22 R9.1 Z5.1 | length 53.5
  Top Layer w0.3: 60.075,41.4 60.3,41.5 60.85,42.05 DD3.22
  Top Layer w0.5: v2(35.5,29) 35.85,29.35 R9.1 ; v2(41.6,41.1) 41.9,41.4 60.075,41.4
  Bottom Layer w0.5: Z5.1 Z5.1@30.8,41.5 ; v2(35.5,29) 35.1,29 33.9,30.2 33.9,31.945 33.925,31.97 33.925,36.105 33.705,36.325 33.705,38.595 Z5.1@30.8,41.5 ; DD2.15 42.925,41.925 42.5,41.5 v2(41.6,41.1) Z5.1@30.8,41.5
NetDD3_20: DD3.20 R14.2 | length 13.5
  Top Layer w0.3: R14.2 57.95,50.65 59.9,48.7 59.9,43.2 60.05,43.05 DD3.20
NetDD3_44: DD3.44 R15.1 | length 27.8
  Top Layer w0.3: DD3.44 70.967,44.55 71.6,43.917 71.6,41.2 v1(71.7,41.3) ; v1(71.3,50.6) 75.5,50.6 76.3,51.4 R15.1 ; v1(75.1,45.8) 75.804,46.504 v1(75.804,48.165) 75.635,48.165 v1@75.6,48.2
  Bottom Layer w0.3: v1(71.3,50.6) 71.3,50.202 70.65,49.552 70.65,48.45 71.2,47.9 75.2,47.9 v1@75.465,48.165 ; v1(71.7,41.3) 72.5,41.3 73.4,42.2 73.4,43.3 74.7,44.6 74.7,45.4 v1(75.1,45.8)
NetHL1_1: HL1.1 R11.1 | length 9.7
  Top Layer w0.75: R11.1 94,26.8 94.8,26 HL1.1
NetHL1_2: HL1.2 VT2.2 | length 57.3
  Top Layer w0.75: VT2.2@81.9,50.3 v1(84.5,50.3) ; VT2.2@88.1,50.3 VT2.2@88.1,50.7 ; v1(88.5,56.1) 88.5,55.5 88.1,55.1 VT2.2@88.1,50.7 ; HL1.2 102.54,48.76 96.9,54.4 91.8,54.4 VT2.2@88.1,50.7
  Bottom Layer w0.75: v1(84.5,50.3) 84.5,52.5 88.1,56.1 v1(88.5,56.1)
NetHL2_1: HL2.1 R16.2 | length 4.4
  Top Layer w0.75: R16.2 HL2.1
NetHL3_1: HL3.1 R18.2 | length 4.3
  Top Layer w0.5: R18.2 HL3.1
NetK1_3: K1.3 XP1.2
NetK1_5: K1.5 R11.2 | length 7.6
  Top Layer w0.75: R11.2 94,38.6 K1.5
NetR5_2: R5.2 XS1.3 | length 8.8
  Bottom Layer w0.75: R5.2 15.08,46.58 XS1.3
NetR6_2: R6.2 XS1.15 | length 8.9
  Bottom Layer w0.5: XS1.15 45.56,47.44 49.25,43.75 R6.2
NetR7_1: R7.1 R8.2 VT2.1 | length 24
  Top Layer w0.3: R7.1 79.1,45.8 79.5,45.4 83.6,45.4 ; VT2.1 84.5,53 85.9,51.6 85.9,46.3 85,45.4 83.6,45.4 ; R8.2 83.55,45.35 83.6,45.4
NetVT1_2: VT1.2 XS1.16 | length 8.8
  Bottom Layer w0.5: XS1.16 48.1,48.7 48.9,47.9 VT1.2@55.3,47.9
P3: DD2.7 R4.1 VT1.1 | length 31.2
  Top Layer w0.3: v2@57.5,39.7 v2(59.9,39.7)
  Bottom Layer w0.3: DD2.7 36.575,37.375 36.615,37.415 37.149,37.415 37.449,37.715 40.251,37.715 40.451,37.515 51.349,37.515 53.634,39.8 v2@57.4,39.8 ; v2(57.5,39.8) v2@57.4,39.8 ; VT1.1 58,40.4 v2@57.4,39.8 ; v2(59.9,39.7) 61.7,39.7 62.75,40.75 R4.1
pump_out: DD3.45 R7.2 Z13.1 | length 20.1
  Top Layer w0.3: v2(67.4,44.7) 68.3,44.7 68.65,45.05 DD3.45 ; R7.2 79.4,49.35 Z13.1
  Bottom Layer w0.3: v2(67.4,44.7) 69.785,47.085 75.349,47.085 75.434,47 77.1,47 79.4,49.3 Z13.1
RESET: C7.1 DD3.7 R17.1 SB2.4 | length 26.4
  Top Layer w0.3: v2(65.5,49.9) 65.6,49.8 65.6,47.938 DD3.7
  Bottom Layer w0.5: v2(65.5,49.9) 65.9,49.9 66.5,50.5 66.5,58.3 69.1,60.9 77.761,60.9 SB2.4
RS: DD2.4 XS1.4 Z9.1 | length 55.3
  Top Layer w0.3: XS1.4 17.62,46.38 28.6,35.4 29.9,35.4 32.4,32.9 32.4,26.9 36,23.3 40.7,23.3 43.7,26.3 Z9.1
  Bottom Layer w0.3: DD2.4 40.385,32.815 43.7,29.5 Z9.1
RW: DD2.5 XS1.5 Z8.1 | length 48.1
  Top Layer w0.3: XS1.5 20.16,45.94 28.9,37.2 32.9,37.2 33.6,36.5 33.6,29.2 35.785,27.015 41.415,27.015 41.95,27.55 Z8.1
  Bottom Layer w0.3: DD2.5 39.115,32.385 41.95,29.55 Z8.1
RxD: A1.4 DD3.30 Z14.1 | length 30.2
  Top Layer w0.3: DD3.30 65.65,34.25 67.4,32.5 77.88,32.5 A1.4
  Bottom Layer w0.5: Z14.1 76.8,22 78.28,23.48 A1.4
TxD: A1.3 DD3.31 Z15.1 | length 30.9
  Top Layer w0.3: DD3.31 66.15,36.05 68.2,34 80.3,34 80.82,33.48 A1.3
  Bottom Layer w0.5: Z15.1 80.75,32.03 A1.3
pads on no net: DD1.1 DD1.3 DD2.13 DD3.1 DD3.3 DD3.4 DD3.10 DD3.11 DD3.12 DD3.13 DD3.14 DD3.15 DD3.16 DD3.17 DD3.18 DD3.19 DD3.25 DD3.26 DD3.27 DD3.28 DD3.29 DD3.32 DD3.33 DD3.38 DD3.39 DD3.40 DD3.41 DD3.46 K1.1 SB1.2 SB1.3 SB2.2 SB2.3 XS1.7 XS1.8 XS1.9 XS1.10

## Polygon pours and split planes (outlines as drawn)
GND on Top Layer "GND_PolyGon" (solid, remove dead copper, pour order 69): 0,2.5 0,51.23 cw(c1.27,51.23) 1.27,52.5 48.73,52.5 ccw(c48.73,53.77) 50,53.77 50,63.73 cw(c51.27,63.73) 51.27,65 111.23,65 cw(c111.23,63.73) 112.5,63.73 112.5,26.27 cw(c111.23,26.27) 111.23,25 106.27,25 ccw(c106.27,23.73) 105,23.73 105,1.27 cw(c103.73,1.27) 103.73,0 1.27,0 cw(c1.27,1.27) 0,1.27
GND on Top Layer "Top Overlay-No Net" (solid, remove dead copper, pour order 65): 0.9,23 2.1,21.8 21.9,21.8 27.1,16.6 27.1,13.5 28.2,12.4 36.9,12.4 36.9,12.6 37.5,13.2 37.5,21.5 36.5,22.5 33.4,22.5 28.5,27.4 0.9,27.4
RESET on Top Layer "Top Overlay-No Net" (solid, remove dead copper, pour order 22): 78,64 78,61.1 78.9,60.2 87.4,60.2 89.8,57.8 97.9,57.8 101.2,54.5 110.4,54.5 111.5,55.6 111.5,63.1 110.6,64
GND on Top Layer "Top Overlay-No Net" (solid, remove dead copper, pour order 20): 60,54.5 51.5,54.5 51,55 51,63.5 75.1,63.5 78.2,60.4 78.2,52.3 77,51.1 61.1,51.1 60,52.2
GND on Top Layer "Top Overlay-No Net" (solid, remove dead copper, pour order 60): 90.6,1.5 104,1.5 104,18.7 99.2,23.5 93.4,23.5 90.1,26.8 90.1,33.2 88.2,35.1 84.6,35.1 83,33.5 83,25.8 87.9,20.9 90.6,20.9
+3V3 on Top Layer "Top Overlay-No Net" (solid, remove dead copper, pour order 58): 36.1,3.5 38.2,1.4 89.5,1.4 94.4,6.3 94.4,18.1 92.7,19.8 86,19.8 83.9,17.7 83.9,9.8 82.9,8.7 81.6,8.7 36.1,8.7
NetDA1_1 on Top Layer "Top Overlay-No Net" (solid, remove dead copper, pour order 40): 23,16.5 23,13 22.6,12.6 22.6,12.5 21.1,12.5 20.3,11.7 20.3,7.3 20.7,7.3 21,7 21,1 21.1,0.9 17.7,0.9 16.5,2.1 16.5,16.5
+3V3 on Top Layer "Top Overlay-No Net" (solid, remove dead copper, pour order 30): 21.3,12.2 21.3,7.6 21.7,7.2 24,7.2 24.1,7.1 24.1,2.8 24.3,2.6 28.7,2.6 30.398,4.298 30.398,5.598 30.7,5.9 32.6,5.9 33,6.3 33,12.2
GND on Top Layer "Top Overlay-No Net" (solid, remove dead copper, pour order 18): 71.5,44.5 71.5,43 72.4,42.1 77.9,42.1 79.6,40.4 79.6,30.9 80.7,29.8 84.2,29.8 85,30.6 85,34.8 82.8,37 82.8,44.5
+3V3 on Top Layer "Top Overlay-No Net" (solid, remove dead copper, pour order 10): 37.7,34.5 37.7,29 38.1,28.6 39.2,28.6 39.8,29.2 39.8,34.5
NetDA1_1 on Top Layer "Top Overlay-No Net" (solid, remove dead copper, pour order 28): 21,7 21,1 21.1,0.9 32.5,0.9 33.3,1.7 33.3,4.8 32.6,5.5 30.4,5.5 29.9,5 29.9,3.4 29,2.5 24,2.5 24,6.4 24,7
NetK1_3 on Top Layer "Top Overlay-No Net" (solid, remove dead copper, pour order 26): 111,26 104.4,26 103.9,26.5 103.9,51.8 106.1,54 111,54
+5V on Top Layer "Top Overlay-No Net" (solid, remove dead copper, pour order 4): 44.5,34.5 44.5,31 45.5,30 53.7,30 55.65,28.05 55.65,24.15 57.6,22.2 62.6,22.2 64.1,23.7 64.1,27.7 63.6,28.2 57.5,28.2 54.3,31.4 54.3,34.5
+5V on Top Layer "Top Overlay-No Net" (solid, remove dead copper, pour order 2): 53.5,25 53.5,21.5 54,21 56.9,21 57.5,21.6 57.5,25
GND on Top Layer "Top Overlay-No Net" (solid, remove dead copper, pour order 0): 54.9,22.3 66.6,22.3 66.6,10.3 54.9,10.3
GND on Bottom Layer "Top Overlay-No Net" (solid, remove dead copper, pour order 38): 14.5,7 26.8,7 27.7,7.9 27.7,27.6 25.8,29.5 11.5,29.5 10.4,28.4 10.4,22 10.9,21.5 18,21.5 18.5,21 18.5,13.1 17.9,12.5 12.7,12.5 12.7,7.029 12.684,7.013
+5V on Bottom Layer "Top Overlay-No Net" (solid, remove dead copper, pour order 34): 4.5,12.5 4.5,1.5 5.1,0.9 27.3,0.9 30.2,3.8 30.2,6 29.5,6.7 14.5,6.7 12.3,8.9 12.3,12.5
NetVT1_2 on Bottom Layer "Top Overlay-No Net" (solid, remove dead copper, pour order 16): 50.7,49.3 50.7,40.5 59.9,40.5 59.9,49.3
GND on Bottom Layer "Top Overlay-No Net" (solid, remove dead copper, pour order 56): 1,37.5 9.2,37.5 9.7,38 9.7,40.9 8.5,42.1 8.5,44.5 11.5,47.5 11.5,51.3 11.2,51.6 11.1,51.5 1,51.5
+5V on Bottom Layer "Top Overlay-No Net" (solid, remove dead copper, pour order 52): 27.7,34 32.9,34 33.2,34.3 33.2,37.2 31,39.4 25.2,39.4 22.4,42.2 19.4,42.2 18.6,41.4 18.6,38.8 19,38.4 21.2,38.4 22,37.6 22,35.6 22.3,35.3 25.2,35.3 26.3,36.4 27.8,36.4
NetDA2_5 on Bottom Layer "Top Overlay-No Net" (solid, remove dead copper, pour order 46): 10.2,40 10.2,34.5 10.7,34 13.2,34 14,34.8 14,40
+24V on Bottom Layer "Top Overlay-No Net" (solid, remove dead copper, pour order 36): 18,21 18,14 17.3,13.3 3.6,13.3 0.8,16.1 0.8,21.1 2,22.3 4.1,22.3 6.7,24.9 6.7,34.4 7,34.7 7,34.8 8.5,34.8 10.4,34.8 16,34.8 16,32.5 10.8,32.5 10,32.5 9.7,32.2 9.7,21.1 9.8,21
+3V3 on Bottom Layer "Top Overlay-No Net" (solid, remove dead copper, pour order 14): 36.6,1.6 91.8,1.6 91.8,15.3 38.7,15.3 36.6,13.2

## Keep-outs
Keep-Out Layer:
  region: 104.9,0 104.9,0.4 0,0.4 0,0
  rectangle: 104.6,0 105,25.3
  region: 112.5,24.9 112.5,25.3 105,25.3 105,24.9
  region: 112.5,65 112.1,65 112.1,25 112.5,25
  region: 112.5,64.6 112.5,65 50,65 50,64.6
  rectangle: 50,52.1 50.4,65
  region: 50,52.1 50,52.5 0,52.5 0,52.1
  rectangle: 0,0 0.4,52.5

## Other copper
Bottom Layer:
  region net NetDA2_1: 10,32.2 10,30 14.8,30 14.8,32.2

## Silkscreen, mask and mechanical layers (free items; w line width, h text height)
Board:
  lines w0.2: 0,-37.5 75,-37.5 75,-35 ; 0,15 0,2.5 0,1.27 ccw(c1.27,1.27) 1.27,0 2.5,0 75,0 102.5,0 103.73,0 ccw(c103.73,1.27) 105,1.27 105,2.5 105,22.5 105,23.73 cw(c106.27,23.73) 106.27,25 107.5,25 110,25 111.23,25 ccw(c111.23,26.27) 112.5,26.27 112.5,27.5 ; 0,50 0,51.23 cw(c1.27,51.23) 1.27,52.5 2.5,52.5 47.5,52.5 48.73,52.5 ccw(c48.73,53.77) 50,53.77 50,55 50,62.5 50,63.73 cw(c51.27,63.73) 51.27,65 52.5,65 ; 110,65 111.23,65 cw(c111.23,63.73) 112.5,63.73 112.5,62.5
  lines w0.254: 0,15 0,50 ; 52.5,65 110,65 ; 112.5,27.5 112.5,62.5

## Text inside footprints (layer, text, board x,y; h text height)
A1: Bottom Overlay "+5V" at 85.519,27.782 h1 r270; Bottom Overlay "Gnd" at 82.725,27.782 h1 r270; Bottom Overlay "TxD" at 80.312,27.782 h1 r270; Bottom Overlay "RxD" at 77.899,27.782 h1 r270
Bt1: Bottom Overlay "CH25-2032" at 71.6,7.9 h1
XP1: Bottom Overlay "GND" at 104.96,28.166 h1; Bottom Overlay "VCC" at 104.833,33.5 h1
XP2: Bottom Overlay "GND" at 78.3,44.16 h1 r180; Bottom Overlay "DCLK" at 78.3,41.66 h1 r180; Bottom Overlay "DIO" at 78.4,39.16 h1 r180; Bottom Overlay "3V3" at 78.4,36.36 h1 r180
XP3: Bottom Overlay "GND" at 5.84,25.134 h1 r180; Bottom Overlay "VCC" at 5.967,19.8 h1 r180